# Altium PCB ECE453_Custom.PcbDoc
Units mil, origin at the board's own origin, x right, y up, seen from the top; angles counter-clockwise.
Board outline 2347.18 x 3917.24 mil, 2 copper layers (Top Layer, Bottom Layer); 17 components, 10 nets, 48 pads, 7 vias.
Unrouted connection lines stored in the file: 2.
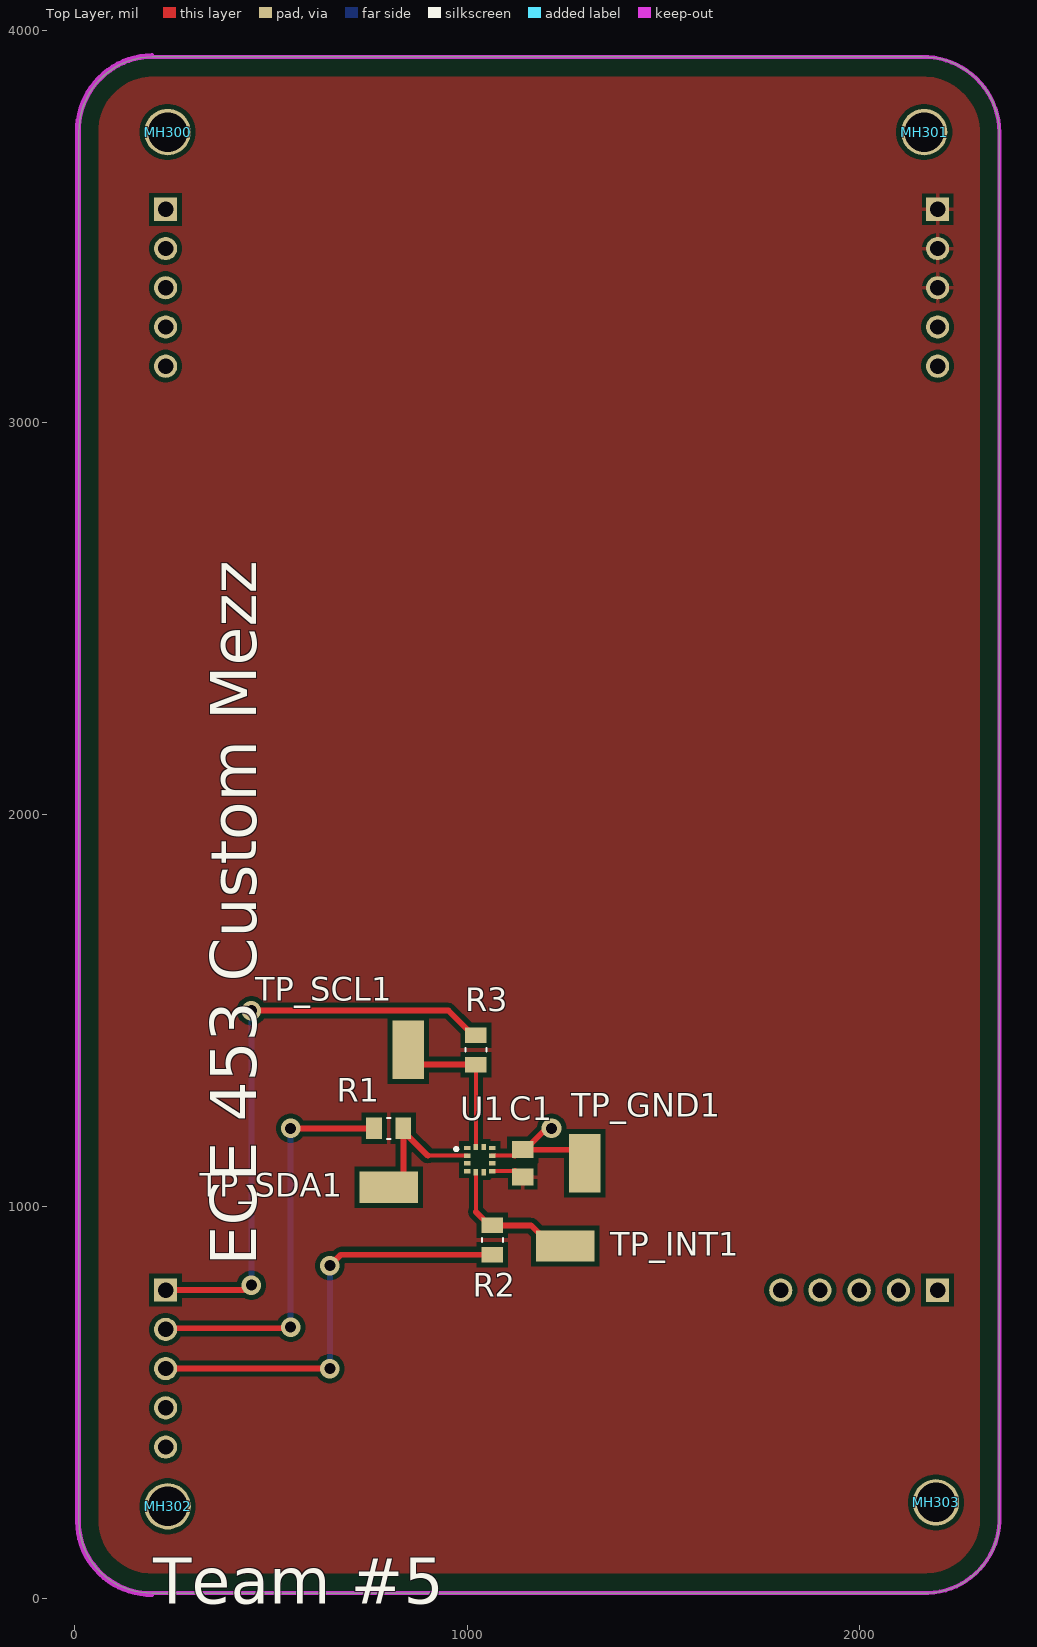
[diagram p0: Top Layer view]
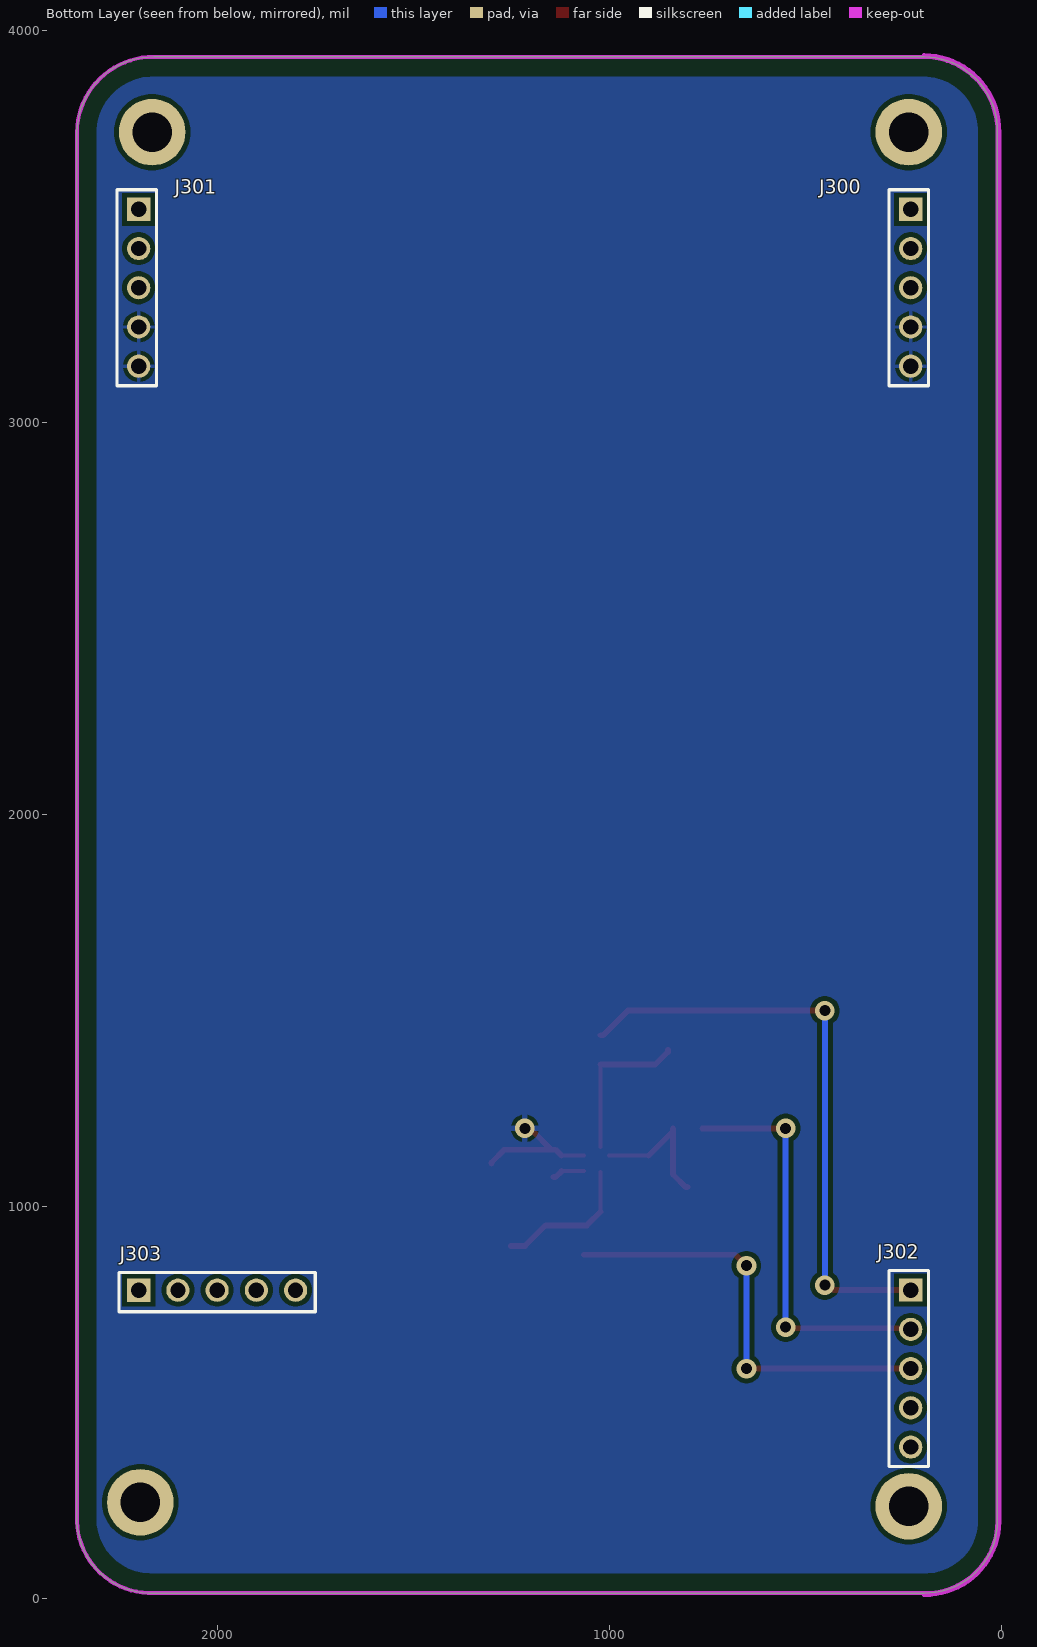
[diagram p1: Bottom Layer view, seen from below]
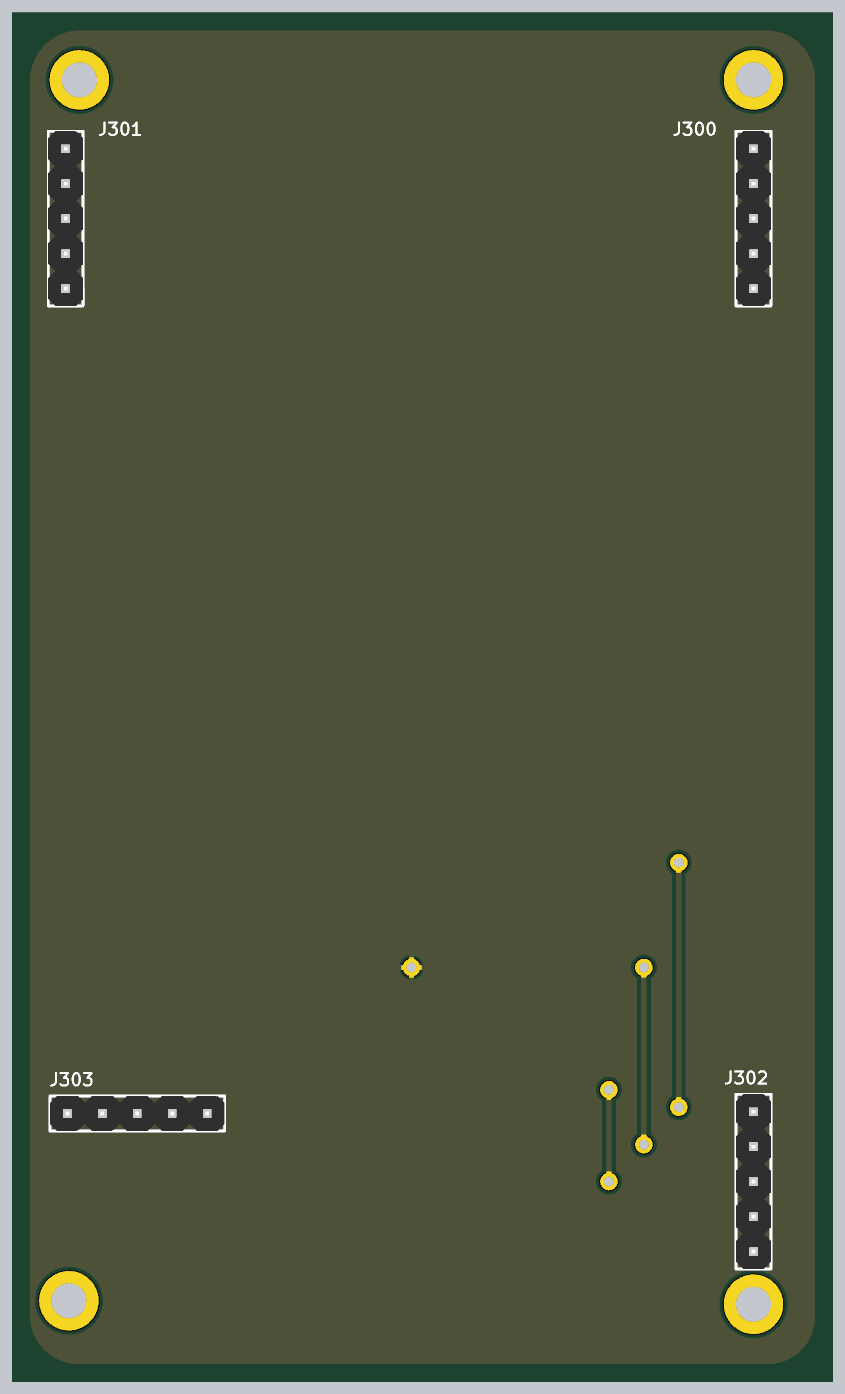
[diagram p2: 3D render of the assembled board from below, using the file's embedded part models]

## Layer stack, top to bottom
Top Solder: solder mask 0.4, Solder Resist, Dk 3.5
Top Layer: signal copper 1.4
Dielectric1: dielectric 12.6, FR-4, Dk 4.8
Bottom Layer: signal copper 1.4
Bottom Solder: solder mask 0.4, Solder Resist, Dk 3.5

## Board outline
10.01,196.88 ccw(c194.35,199.35) 196.78,15.01 cw(c196.85,10) 196.85,15.02 2160.35,15.02 cw(c2160.35,10) 2160.58,15.01 ccw(c2167.85,204.35) 2357.19,196.95 2357.19,3740.13 ccw(c2162.85,3737.66) 2160.45,3931.99 ccw(c2162.85,3737.66) 2160.42,3931.99 2160.45,3931.99 cw(c2160.35,3937.01) 2160.35,3931.99 200,3931.99 cw(c200,3937.01) 198.43,3932.25 cw(c196.85,3937.01) 196.91,3931.99 ccw(c199.35,3742.66) 10.01,3740.25 ccw(c199.35,3742.66) 10.01,3740.22 10.01,3740.25 cw(c5,3740.16) 10.01,3740.16 10.01,196.88 cw(c194.35,199.35)

## Design rules (kind name [scope] priority, off if disabled: settings)
BoardOutlineClearance [All] p1: gap=50 ignorepadtopadclearanceinfootprint=FALSE
Clearance Polygon_Clearance [All vs InPolygon] p1: gap=12 ignorepadtopadclearanceinfootprint=TRUE
Clearance [All] p2: gap=7 ignorepadtopadclearanceinfootprint=TRUE
ComponentClearance [InComponent('U3')] p1: gap=0 collisioncheckmode=3 verticalgap=10 showdistances=FALSE
Height [All] p1: minheight=0 maxheight=866.14 prefheight=500
HoleSize [All] p1: absolutevalues=TRUE maxlimit=250 minlimit=15 maxpercent=80.000 minpercent=20.000
MinimumAnnularRing [All] p1: minimumring=7
MinimumSolderMaskSliver [All] p1: minsoldermaskwidth=1
NetAntennae NetAntennae_5.0V [InNet('5.0V')] p1: netantennaetolerance=0
NetAntennae NetAntennae_3.3V [InNet('3.3V')] p2: netantennaetolerance=0
PolygonConnect [IsNamedPolygon('5.0V_L01_P019') or IsNamedPolygon('3.3V_L01_P020') vs IsVia] p1: connectstyle=Relief reliefconductorwidth=10 reliefentries=4 polygonreliefangle="90 Angle" airgapwidth=10
PolygonConnect PolygonConnect_2 [All vs IsVia] p2: connectstyle=Relief reliefconductorwidth=15 reliefentries=4 polygonreliefangle="90 Angle" airgapwidth=10
PolygonConnect PolygonConnect_1 [All] p3: connectstyle=Relief reliefconductorwidth=10 reliefentries=4 polygonreliefangle="90 Angle" airgapwidth=10
RoutingVias [All] p1: holewidth=15 width=30 viastyle="Through Hole" minholewidth=15 minwidth=30 maxholewidth=28 maxwidth=50
SilkToSilkClearance [All] p1: silktosilkclearance=1
SilkToSolderMaskClearance [IsPad] p1: minsilkscreentomaskgap=1 clearancetoexposedcopper=TRUE
SolderMaskExpansion [All] p1: expansion=4 istentingtop=FALSE
UnRoutedNet [All] p1: checkbadconnections=TRUE
Width [All] p1: maxlimit=472.44 minlimit=7 preferedwidth=15 minimp=50.000000 maximp=50.000000 favimp=50.000000
22 further rules are at their usual default settings.

## Components (designator, comment, footprint, x,y, rotation, side; value= is the part's Value field where it differs from the comment)
C1 "CAP_0805_U_2_2" CAPC2012X135N 1141.93,1110.63 r90 top
J300 "CONN_HEADER_MALE_1x5" HDR1X5 236.22,3543.31 r270 bottom
J301 "CONN_HEADER_MALE_1x5" HDR1X5 2204.72,3543.31 r270 bottom
J302 "CONN_HEADER_MALE_1x5" HDR1X5 236.22,787.4 r270 bottom
J303 "CONN_HEADER_MALE_1x5" HDR1X5 2199.61,782.28 r180 bottom
MH300 "MHOLE_2_55MM" MHOLE_2_55MM#1 236.22,3740.16 r90 top locked
MH301 "MHOLE_2_55MM" MHOLE_2_55MM#1 2165.35,3740.16 r90 top locked
MH302 "MHOLE_2_55MM" MHOLE_2_55MM#1 236.22,236.22 r90 top locked
MH303 "MHOLE_2_55MM" MHOLE_2_55MM#2 2165.35,236.22 r0 top locked
R1 "RES_0805_2_7K_OHM" RESC2012X65N 800,1200 r180 top
R2 "RES_0805_2_7K_OHM" RESC2012X65N 1064.17,915.16 r270 top
R3 "RES_0805_2_7K_OHM" RESC2012X65N 1022.24,1400 r90 top
TP_GND1 "5019" KSTN-5019_V 1300,1110.63 r90 top
TP_INT1 "5019" KSTN-5019_V 1250,900 r180 top
TP_SCL1 "5019" KSTN-5019_V 850,1400 r90 top
TP_SDA1 "5019" KSTN-5019_V 800,1050 r180 top
U1 "MXC6655XA" IC_MXC6655XA 1032.09,1120.47 r0 top

## Footprints (in the part's own frame and the unit in brackets; to place one, negate y for a bottom-side part, rotate by r counter-clockwise, add the part's x,y. Pads: shape width x height; smd on the part's side, far side on the other; paste and mask are expansions set on the pad)
CAPC2012X135N [mm]
  rect 1.1x1.38 smd: 1(-0.885,0) 2(0.885,0)
  body extent -1,-0.63 1,0.63, height 1.35
HDR1X5 [mil] "Connector; Header; 5 Position"
  rect 59.06x59.06 hole 39: 1(0,5)
  round 59.06 hole 39: 2(100,5) 3(200,5) 4(300,5) 5(400,5)
  silkscreen extent -50,-50 450,50, body extent -50,-50 450,50, height 330
IC_MXC6655XA [mm]
  rect 0.41x0.28 smd mask+0: 1(-0.815,0.75) 2(-0.815,0.25) 3(-0.815,-0.25) 4(-0.815,-0.75) 7(0.815,-0.75) 8(0.815,-0.25) 9(0.815,0.25) 10(0.815,0.75)
  rect 0.28x0.41 smd mask+0: 5(-0.25,-0.815) 6(0.25,-0.815) 11(0.25,0.815) 12(-0.25,0.815)
  silkscreen extent -1.62,0.57 -1.42,0.77
KSTN-5019_V [mm] "Test Point, 1-Leads, Body 3.81x2.03mm"
  rect 3.8x2.03 smd: 1(0,0)
  body extent -1.9,-1.01 1.9,1.02, height 2.29
MHOLE_2_55MM#1 [mm] "2.55MM Mounting Hole"
  round 3 / inner round 4.572 / far side round 4.318 hole 2.55: 1(0,0)
MHOLE_2_55MM#2 [mm]
  round 3 / inner round 4.572 / far side round 4.318 hole 2.55: 1(0.762,0.254)
RESC2012X65N [mm]
  rect 1.01x1.38 smd: 1(-0.95,0) 2(0.95,0)
  silkscreen extent -0.12,-0.68 0.12,0.68

## Part data
C1: "2.2 micro farad capacitor"
J300 J301 J302 J303: "Header, 5-Pin", Color=Black, Manufacturer 1=Sullins, Manufacturer Part Number 1=PREC005SACN-RC, Package Quantity=1, Supplier Part Number 1=S1032EC-05-ND, ComponentLink1Description=http://www.farnell.com/cad/1737268.pdf, ComponentLink1URL=http://www.farnell.com/cad/1737268.pdf, ComponentLink2Description=http://katalog.we-online.de/em/datasheet/6130xx11121.pdf, ComponentLink2URL=http://katalog.we-online.de/em/datasheet/6130xx11121.pdf, ComponentLink3Description=https://datasheet.ciiva.com/741/xrxczzzsxxn-rc-st-11635-b-741840.pdf?src-supplier=Digi-Key, ComponentLink3URL=https://datasheet.ciiva.com/741/xrxczzzsxxn-rc-st-11635-b-741840.pdf?src-supplier=Digi-Key, Connector Type="Male Pin", Contact Mating Length=0.23inch, Contact Plating=Tin, Mount="Through Hole", Number of Positions=5, Number of Rows=1, Packaging=Bulk, Pitch=0.1inch, Pricing 1="1=0.19000, 10=0.17400, 25=0.12960, 50=0.11120, 100=0.10740, 250=0.09264, 500=0.08892 (USD)", RoHS=Yes, Stock 1=0, Supplier 1=Digi-Key, Termination=Solder
MH300 MH301 MH302 MH303: "Mounting Holde", Manufacturer Part Number="UW MTHOLE"
R1 R2 R3: "2.7 KOhm resistor"
TP_GND1 TP_INT1 TP_SCL1 TP_SDA1: library part CMP-1672-00008-1, "Test Point, 1 Position SMD, RoHS, Tape and Reel", Package Quantity=1000, ComponentLink1Description="Manufacturer URL", ComponentLink1URL=http://www.keyelco.com/, ComponentLink2Description=Datasheet, ComponentLink2URL=http://www.keyelco.com/product-pdf.cfm?p=1357, Contact Plating=Silver, DatasheetVersion=03/2014, Mount="Surface Mount", Mounting Technology="Surface Mount", PackageDescription="1-Pin Surface Mount Device, Body 3.81 x 2.03 mm", PackageReference=5019, Packaging="Tape and Reel", Pins=1, RoHSCompliant=True
U1: "Aceelerometer"

## Via types
v1: diameter 50, hole 28, Top Layer to Bottom Layer, 7 vias

## Nets (pads, with @x,y where several pads share a name; then routed paths per layer and width w, separated by ;. In a path a pad name is that pad's centre, name@x,y a point inside that pad or via, vN(x,y) a via of type N, cw(c..) or ccw(c..) an arc to the next point about the centre after c; other vN are vias at no path point)
3.3V: C1.1 J301.1 J301.2 J301.3 U1.7 | length 84
  Top Layer w10: U1.7 C1.1@1121.26,1090.94
  Top Layer w15: C1.1@1121.26,1090.94 1136.42,1075.79 C1.1
5.0V: J300.1 J300.2 J300.3
GND: C1.2 J300.4 J300.5 J301.4 J301.5 TP_GND1.1 U1.9 | length 348.2
  Top Layer w10: U1.9 C1.2@1121.26,1130.31
  Top Layer w15: C1.2@1121.26,1130.31 1136.42,1145.47 C1.2 C1.2@1147.44,1145.47 ; v1(1215.16,1200) 1208.46,1193.3 1195.27,1193.3 C1.2@1147.44,1145.47 ; TP_GND1.1 1300,1113.01 1267.54,1145.47 C1.2@1147.44,1145.47
INT: J302.3 R2.2 | length 1107
  Top Layer w15: J302.3 v1(650,587.4) ; v1(650,850) 677.76,877.76 R2.2
  Bottom Layer w15: v1(650,587.4) v1(650,850)
INT_ACCEL: R2.1 TP_INT1.1 U1.5 | length 365.1
  Top Layer w10: 1022.24,987.2 U1.5
  Top Layer w15: 1022.24,987.2 1056.89,952.56 R2.1 1162.6,952.56 1215.16,900 TP_INT1.1
SCL: J302.1 R3.2 | length 1522.2
  Top Layer w15: J302.1 427.93,787.4 440.53,800 v1(450,800) ; v1(450,1500) 952.36,1500 1014.96,1437.4 R3.2
  Bottom Layer w15: v1(450,800) v1(450,1500)
SCL_ACCEL: R3.1 TP_SCL1.1 U1.12 | length 400.7
  Top Layer w10: U1.12 R3.1
  Top Layer w15: TP_SCL1.1 850,1395.06 882.46,1362.6 R3.1
SDA: J302.2 R1.2 | length 1040.8
  Top Layer w15: J302.2 233.95,690.14 547.27,690.14 v1(550,692.87) ; v1(550,1200) R1.2
  Bottom Layer w15: v1(550,692.87) v1(550,1200)
SDA_ACCEL: R1.1 TP_SDA1.1 U1.2 | length 356.8
  Top Layer w10: 899.8,1130.31 U1.2
  Top Layer w15: TP_SDA1.1 804.94,1050 837.4,1082.46 R1.1@837.4,1192.72 ; R1.1 R1.1@837.4,1192.72 ; 899.8,1130.31 R1.1@837.4,1192.72
XRES_N: J302.5
pads on no net: J302.4 J303.1 J303.2 J303.3 J303.4 J303.5 MH300.1 MH301.1 MH302.1 MH303.1 U1.1 U1.3 U1.4 U1.6 U1.8 U1.10 U1.11

## Polygon pours and split planes (outlines as drawn)
GND on Bottom Layer "GND" (solid, pour order 1): 0,3950 0,0 2400,0 2400,3950
3.3V on Top Layer "3.3V" (solid, pour order 2): 0,3950 0,0 2400,0 2400,3950

## Keep-outs
Keep-Out Layer:
  lines w10: 10.01,196.92 ccw(c194.35,199.35) 10.01,196.88 ; 5,196.85 ccw(c194.35,199.35) 196.85,10 cw(c194.35,199.35) 5,196.85 ; 5,196.85 5,3740.16 ; 5,196.85 5,3740.16 ; 5,3740.16 cw(c199.35,3742.66) 196.85,3937.01 ; 5,3740.16 cw(c199.35,3742.66) 196.85,3937.01 ; 10.01,196.88 ccw(c194.35,199.35) 196.78,15.01 cw(c196.85,10) 196.85,15.02 2160.35,15.02 cw(c2160.35,10) 2160.58,15.01 ccw(c2167.85,204.35) 2357.19,196.95 2357.19,3740.13 ccw(c2162.85,3737.66) 2160.45,3931.99 ; 10.01,196.88 10.01,3740.16 ccw(c5,3740.16) 10.01,3740.25 ; 10.01,3740.25 ccw(c199.35,3742.66) 10.01,3740.22 10.01,3740.25 ; 10.01,3740.25 cw(c199.35,3742.66) 196.91,3931.99 ccw(c196.85,3937.01) 198.43,3932.25 ccw(c200,3937.01) 200,3931.99 2160.35,3931.99 ccw(c2160.35,3937.01) 2160.45,3931.99 ; 196.85,3937.01 196.85,3937.01 ; 196.85,3937.01 196.85,3937.01 ; 2160.45,3931.99 ccw(c2162.85,3737.66) 2160.42,3931.99 ; 2160.42,3931.99 2160.45,3931.99

## Silkscreen, mask and mechanical layers (free items; w line width, h text height)
Top Overlay:
  text "ECE 453 Custom Mezz" at 500,850 h200 r90
  text "Team #5" at 200,-50 h200
Mechanical 2:
  lines w10: 196.85,3937.01 ccw(c199.35,3742.66) 5,3740.16 5,196.85 ccw(c194.35,199.35) 196.85,10 ; 200,3937.01 2160.35,3937.01 cw(c2162.85,3737.66) 2362.2,3740.16 2362.2,196.85 cw(c2167.85,204.35) 2160.35,10 196.85,10 ; 196.85,10 196.85,10

## Dimensions
1799.61,787.28 to 231.22,787.4 on Mechanical 5
2199.72,3543.31 to 2199.61,787.28 on Mechanical 5
231.22,3543.31 to 231.22,787.4 on Mechanical 5
231.22,3543.31 to 2199.72,3543.31 on Mechanical 5